# EAGLE board powerCard_rev0.1-proto (EAGLE 9.4.2)
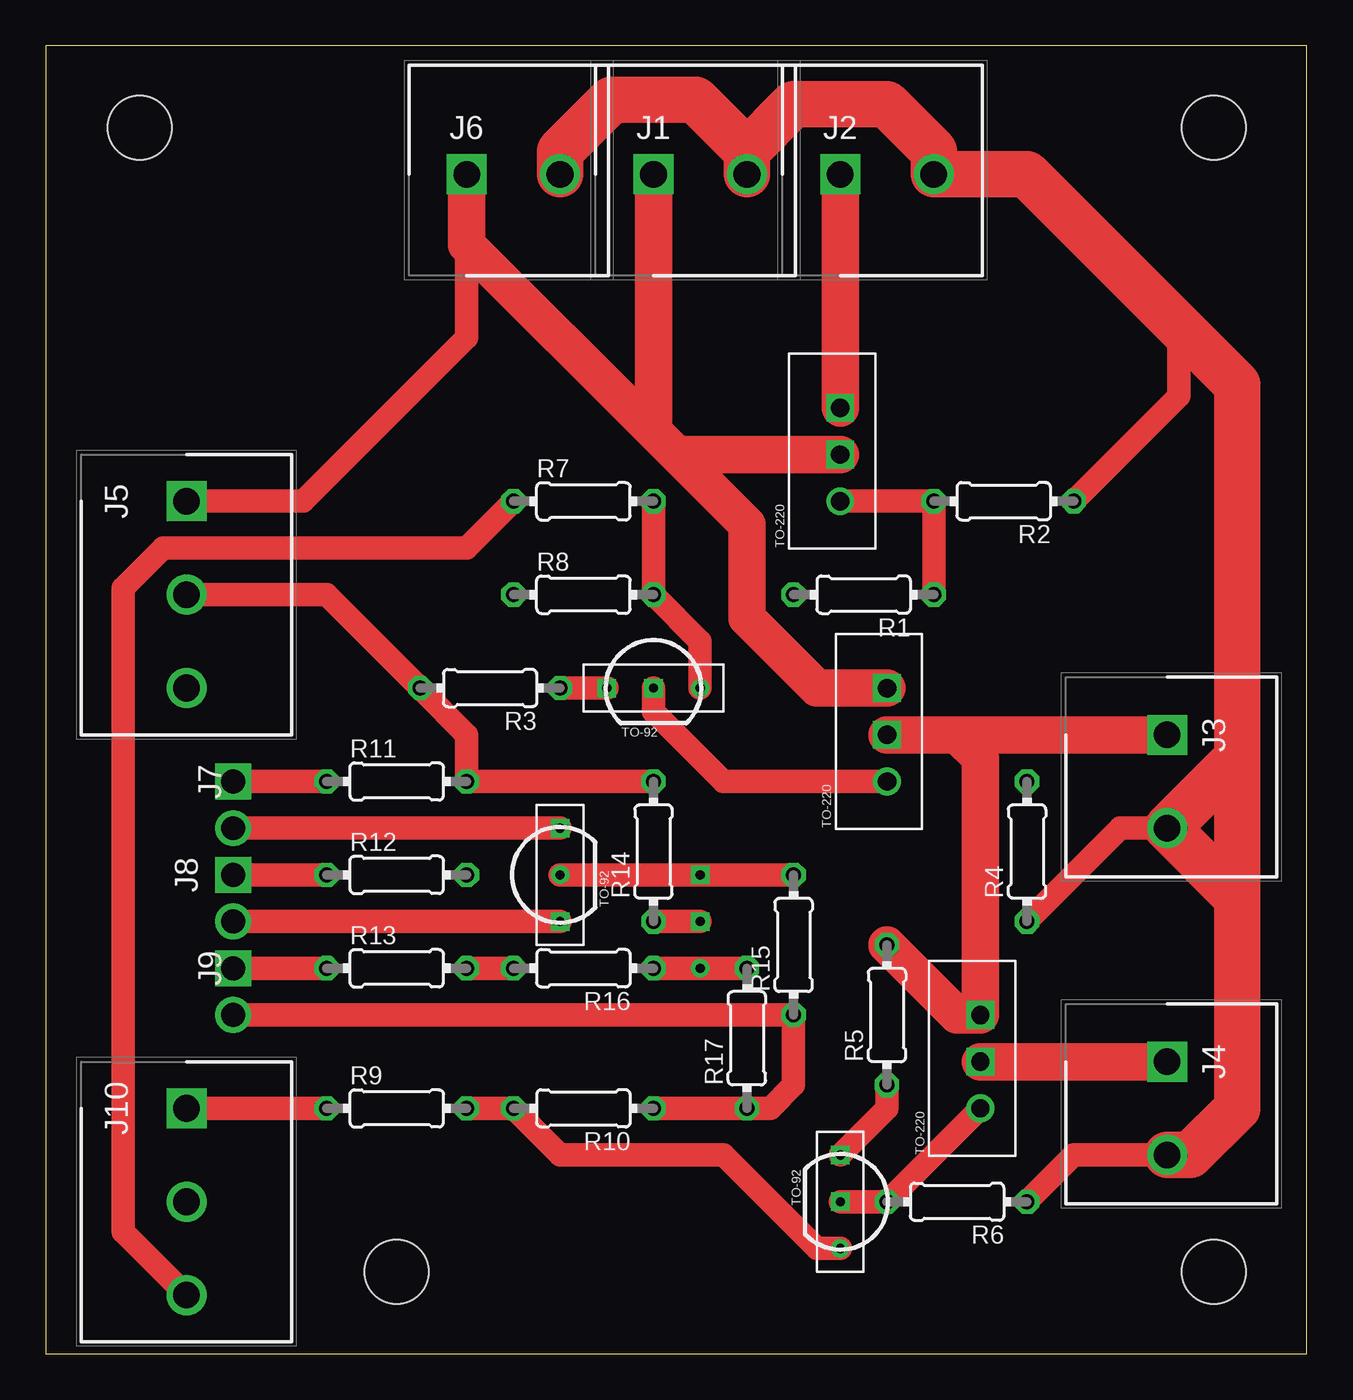
[diagram p0: board, top side]
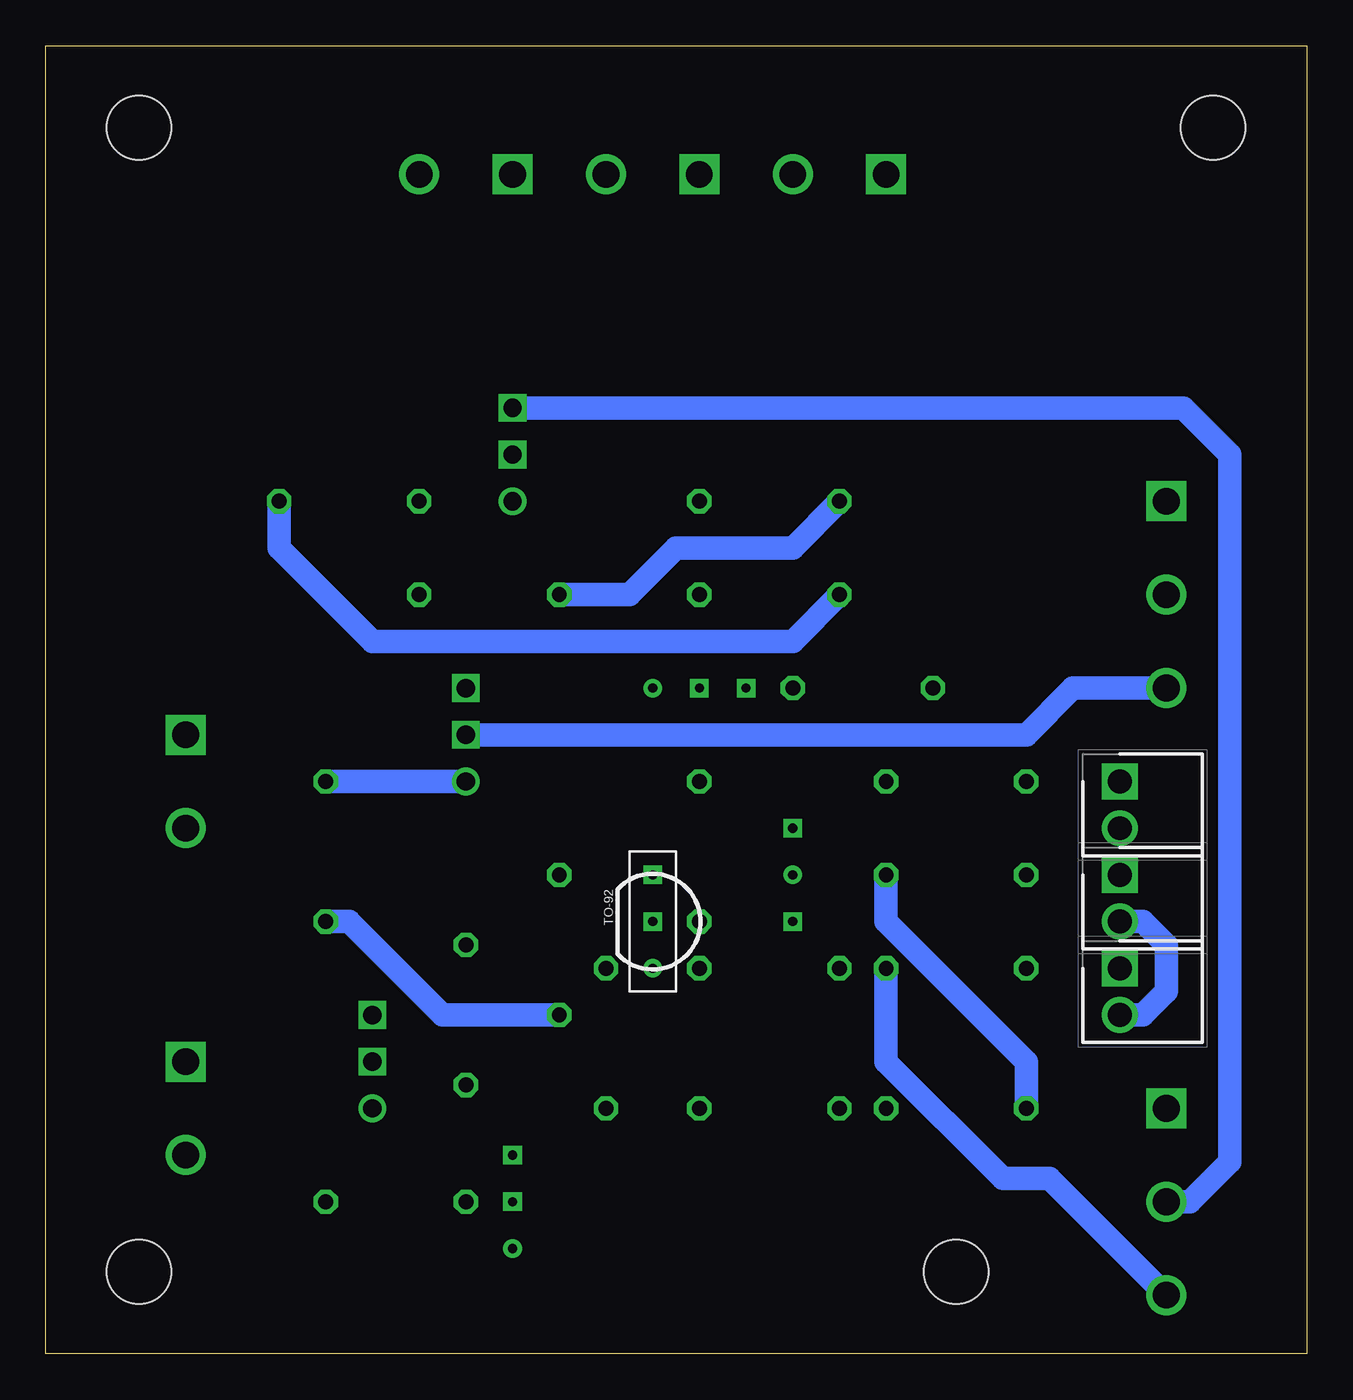
[diagram p1: board, bottom side, seen from below]

Size 68.59 x 71.12 mm. Coordinates in mm from the lower left corner, seen from the top.
Outline: 0,0 68.59,0 68.59,71.12 0,71.12 0,0
Copper layers (1*16): Top 0.035mm / dielectric 1.5mm / Bottom 0.035mm
Design rules "default": minimum track width 6mil, minimum drill 0.35mm, track to track 6mil, track to pad 6mil, pad to pad 6mil, via to via 6mil, smd to smd 6mil, copper to edge 40mil, drill to drill 6mil, minimum pad ring 10mil, minimum via ring 8mil, stop-mask expansion 4mil, vias tented up to drill 0mil, thermal gap 10mil
Holes 3.5 mm at 5.11,66.68 63.53,66.68 63.53,4.45 19.08,4.45

## Footprints (pad centres in the part's own frame; a part is rotated, then mirrored left to right if it is on the bottom)
SHDR2W90P0X508_1X2_1076X1135X1 = drill 1.45 pad 2.175 square: 1 0,0 | drill 1.45 pad 2.175: 2 5.08,0
SHDR3W90P0X508_1X3_1524X1135X1 = drill 1.45 pad 2.175 square: 1 0,0 | drill 1.45 pad 2.175: 2 5.08,0; 3 10.16,0
SHDR2W110P0X254_1X2_554X650X10 = drill 1.3 pad 1.95 square: 1 0,0 | drill 1.3 pad 1.95: 2 2.54,0
0204/7 = drill 0.813 octagon: 1 -3.81,0; 2 3.81,0
TO-220 = drill 1 square: P$1 0,0; P$2 2.54,0 | drill 1: P$3 -2.54,0
TO-92(3L) = drill 0.5 square: P$1 -2.54,0; P$2 0,0 | drill 0.5: P$3 2.54,0
TO-92 = drill 0.5 square: P$1 2.54,0; P$2 -2.54,0 | drill 0.5: P$3 0,0

## Placement (x,y rotation side)
J1  691236510002  [SHDR2W90P0X508_1X2_1076X1135X1]  33.05,64.14 0 top
J2  691236510002  [SHDR2W90P0X508_1X2_1076X1135X1]  43.21,64.14 0 top
J3  691236510002  [SHDR2W90P0X508_1X2_1076X1135X1]  60.99,33.66 270 top
J4  691236510002  [SHDR2W90P0X508_1X2_1076X1135X1]  60.99,15.88 270 top
J5  691236510003  [SHDR3W90P0X508_1X3_1524X1135X1]  7.65,46.36 270 top
J6  691236510002  [SHDR2W90P0X508_1X2_1076X1135X1]  22.89,64.14 0 top
J7  39773-0002  [SHDR2W110P0X254_1X2_554X650X10]  10.19,31.11 270 bottom
J8  39773-0002  [SHDR2W110P0X254_1X2_554X650X10]  10.19,26.04 270 bottom
J9  39773-0002  [SHDR2W110P0X254_1X2_554X650X10]  10.19,20.96 270 bottom
J10  691236510003  [SHDR3W90P0X508_1X3_1524X1135X1]  7.65,13.34 270 top
R1  [0204/7]  44.48,41.28 180 top
R2  [0204/7]  52.1,46.36 180 top
R3  [0204/7]  24.16,36.2 180 top
R4  [0204/7]  53.37,27.31 90 top
R5  [0204/7]  45.75,18.42 90 top
R6  [0204/7]  49.56,8.25 180 top
R7  [0204/7]  29.24,46.36 0 top
R8  [0204/7]  29.24,41.28 0 top
R9  [0204/7]  19.08,13.34 0 top
R10  [0204/7]  29.24,13.34 180 top
R11  [0204/7]  19.08,31.11 0 top
R12  [0204/7]  19.08,26.04 0 top
R13  [0204/7]  19.08,20.96 0 top
R14  [0204/7]  33.05,27.31 90 top
R15  [0204/7]  40.67,22.23 90 top
R16  [0204/7]  29.24,20.96 180 top
R17  [0204/7]  38.13,17.14 90 top
U$1  E-PMOSFET  [TO-220]  43.21,48.9 90 top
U$2  E-PMOSFET  [TO-220]  45.75,33.66 90 top
U$3  E-PMOSFET  [TO-220]  50.83,15.88 90 top
U$4  N-JFET  [TO-92(3L)]  33.05,36.2 0 top
U$5  N-JFET  [TO-92(3L)]  43.21,8.25 270 top
U$6  NPN-BJT  [TO-92]  27.97,26.04 90 top
U$7  N-JFET  [TO-92(3L)]  35.59,23.5 270 bottom

## Library data of the parts
J1-J4 J6 = 691236510002; DESCRIPTION: Fixed Terminal Blocks WR-TBL 2365 Hztl 5.08mm Risng clamp; HEIGHT: 18.1mm; MANUFACTURER_NAME: Wurth Elektronik; MANUFACTURER_PART_NUMBER: 691236510002; MOUSER_PART_NUMBER: 710-691236510002; MOUSER_PRICE-STOCK: https://www.mouser.com/Search/Refine.aspx?Keyword=710-691236510002
J5 J10 = 691236510003; DESCRIPTION: Fixed Terminal Blocks WR-TBL 2365 Hztl 5.08mm Risng clamp; HEIGHT: 18.1mm; MANUFACTURER_NAME: Wurth Elektronik; MANUFACTURER_PART_NUMBER: 691236510003; MOUSER_PART_NUMBER: 710-691236510003; MOUSER_PRICE-STOCK: https://www.mouser.com/Search/Refine.aspx?Keyword=710-691236510003
J7-J9 = 39773-0002; DESCRIPTION: Fixed Terminal Blocks 2.54mm Eurostyle Fxd TB Mnt PCB 2Ckt Grn; HEIGHT: 10mm; MANUFACTURER_NAME: Molex; MANUFACTURER_PART_NUMBER: 39773-0002; MOUSER_PART_NUMBER: 538-39773-0002; MOUSER_PRICE-STOCK: https://www.mouser.com/Search/Refine.aspx?Keyword=538-39773-0002
R1-R17 = rcl; SPICEPREFIX: R
U$1-U$7 = transistors

## Nets
CHG_GATE: R1.1 R2.2 U$1.P$3
CHG_SW: J10.3 R1.2 R7.1 R13.2 R16.2
CHG_VCC: J2.1 J10.2 U$1.P$2
EMG_GATE: R6.2 U$3.P$3 U$5.P$2
EMG_SW: J10.1 R9.1 R12.2
GND: J1.2 J2.2 J3.2 J4.2 J6.2 J8.2 J9.2 R2.1 R4.1 R6.1 R8.1 R10.1 R15.1 R17.1 U$6.P$2
MAIN_SW: J5.2 R3.2 R11.2 R14.2
MAINS_GATE: R4.2 U$2.P$3 U$4.P$2
MAINS_IND_BASE: R15.2 U$6.P$3 U$7.P$1
MAINS_IND_GATE: R16.1 R17.2 U$7.P$3
MAINS_VCC: J3.1 J5.3 R5.2 U$2.P$1 U$3.P$2
MD_VCC: J4.1 U$3.P$1
N$1: R3.1 U$4.P$1
N$2: R7.2 R8.2 U$4.P$3
N$3: R9.2 R10.2 U$5.P$3
N$4: J7.1 R11.1
N$5: R5.1 U$5.P$1
N$6: J8.1 R12.1
N$7: J9.1 R13.1
N$8: J7.2 U$6.P$1
N$11: R14.1 U$7.P$2
VCC: J1.1 J5.1 J6.1 U$1.P$1 U$2.P$2

## Tracks (layer width: path | path; a pad name or v marks a point on that pad's centre or on a via)
CHG_GATE
  Top 1.27: U$1.P$3 R2.2 R1.1
CHG_SW
  Top 1.27: R13.2 R16.2 | R7.1 22.89,43.82 6.38,43.82 4.19,41.63 4.19,6.63 J10.3
  Bottom 1.27: J10.3 14,9.53 16.54,9.53 22.89,15.88 R13.2 | R1.2 36.86,41.28 34.32,43.82 27.97,43.82 R7.1
CHG_VCC
  Top 2.032: J2.1 U$1.P$2
  Bottom 1.27: J10.2 6.38,8.25 4.19,10.44 4.19,48.9 6.73,51.44 U$1.P$2
EMG_GATE
  Top 1.27: U$5.P$2 R6.2 U$3.P$3
EMG_SW
  Top 1.27: J10.1 R9.1
  Bottom 1.27: R9.1 15.27,15.88 22.89,23.5 R12.2
GND
  Top 1.27: J9.2 R15.1 40.67,14.61 39.4,13.34 R17.1 R10.1 | U$6.P$2 J8.2 | R6.1 55.91,10.79 J4.2 | J3.2 58.45,28.57 R4.1 | R2.1 61.62,52.07 61.62,55.88
  Top 2.54: J6.2 27.97,65.41 30.76,68.2 35.33,68.2 38.13,65.41 | 38.13,65.41 J1.2 | 38.13,65.41 40.67,67.95 45.75,67.95 48.29,65.41 J2.2 53.37,64.14 61.62,55.88 64.8,52.7 64.8,32.39 | 64.8,24.77 J3.2 64.8,32.39 | J4.2 62.26,10.79 64.8,13.34 64.8,24.77 | 64.8,32.39 64.8,24.77
  Bottom 1.27: J9.2 8.92,18.42 7.65,19.68 7.65,22.23 8.92,23.5 J8.2 | R4.1 52.1,23.5 47.02,18.42 R15.1 | R8.1 27.97,38.73 50.83,38.73 55.91,43.82 R2.1
MAIN_SW
  Top 1.27: R14.2 R11.2 22.89,33.66 R3.2 15.27,41.28 J5.2
MAINS_GATE
  Top 1.27: U$4.P$2 33.05,34.93 36.86,31.11 U$2.P$3
  Bottom 1.27: U$2.P$3 R4.2
MAINS_IND_BASE
  Top 1.27: U$6.P$3 U$7.P$1 R15.2
MAINS_IND_GATE
  Top 1.27: R16.1 U$7.P$3 R17.2
MAINS_VCC
  Top 2.032: R5.2 49.56,18.42 U$3.P$2 50.83,32.39 49.56,33.66 | U$2.P$1 49.56,33.66 | 49.56,33.66 J3.1
  Bottom 1.27: J5.3 12.73,36.2 15.27,33.66 U$2.P$1
MD_VCC
  Top 2.032: U$3.P$1 J4.1
N$1
  Top 1.27: R3.1 U$4.P$1
N$2
  Top 1.27: U$4.P$3 35.59,38.73 R8.2 R7.2
N$3
  Top 1.27: R9.2 R10.2 27.97,10.79 36.86,10.79 41.94,5.71 U$5.P$3
N$4
  Top 1.27: J7.1 R11.1
N$5
  Top 1.27: U$5.P$1 45.75,13.34 R5.1
N$6
  Top 1.27: J8.1 R12.1
N$7
  Top 1.27: J9.1 R13.1
N$8
  Top 1.27: J7.2 U$6.P$1
N$11
  Top 1.27: R14.1 U$7.P$2
VCC
  Top 1.27: J5.1 14,46.36 22.89,55.25 22.89,60.33
  Top 2.032: J6.1 22.89,61.59 22.89,60.33 33.05,50.17 | 34.32,48.9 U$1.P$1 | J1.1 33.05,50.17 | 33.05,50.17 34.32,48.9 | U$2.P$2 41.94,36.2 38.13,40.01 38.13,45.09 34.32,48.9